# Altium PCB PCB.PcbDoc
Units mil, origin at the board's own origin, x right, y up, seen from the top; angles counter-clockwise.
Board outline 2030 x 1810 mil, 2 copper layers (Top Layer, Bottom Layer); 29 components, 24 nets, 96 pads, 0 vias.
Unrouted connection lines stored in the file: 3.
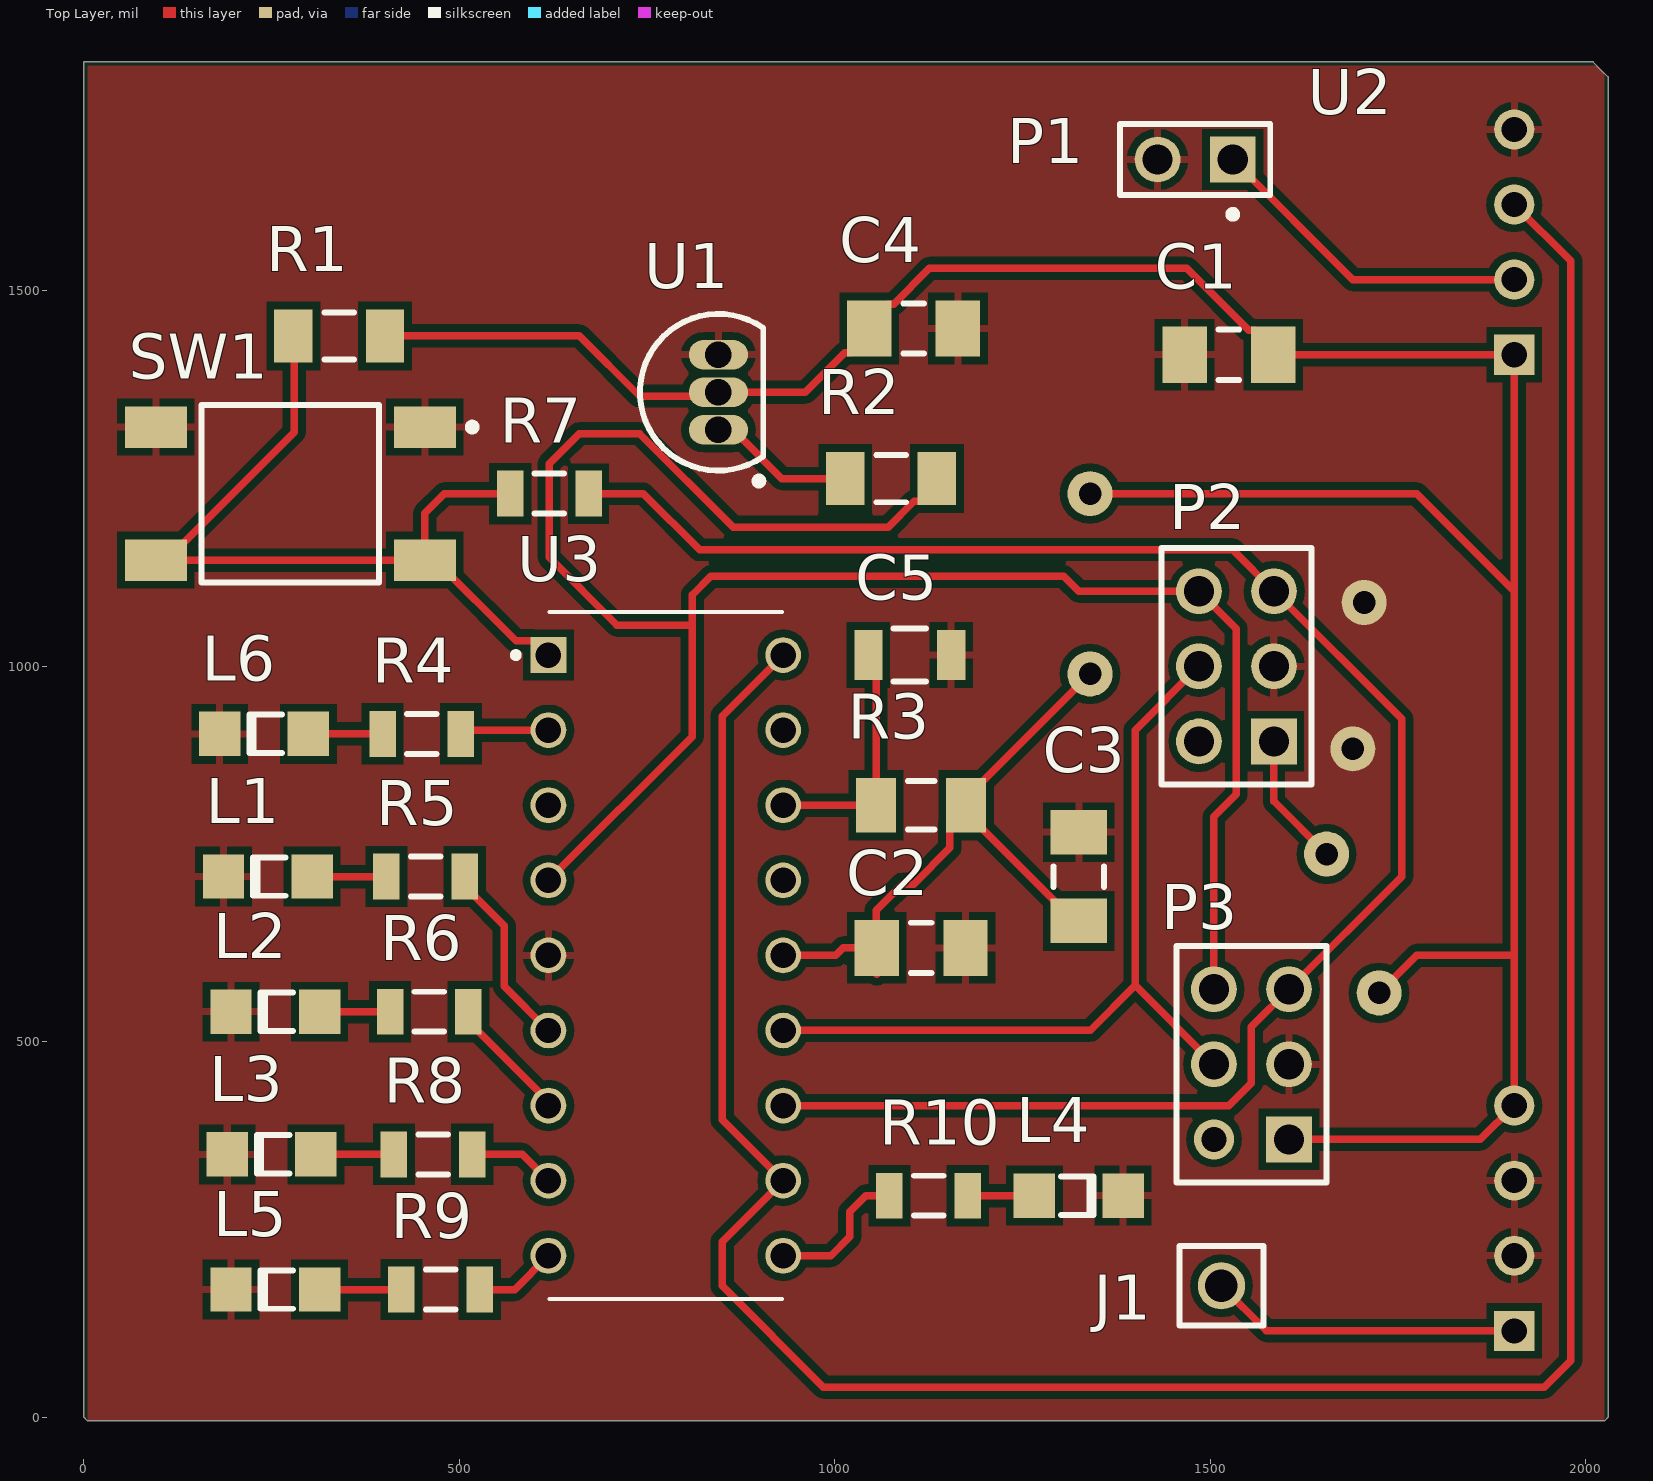
[diagram p0: Top Layer view]
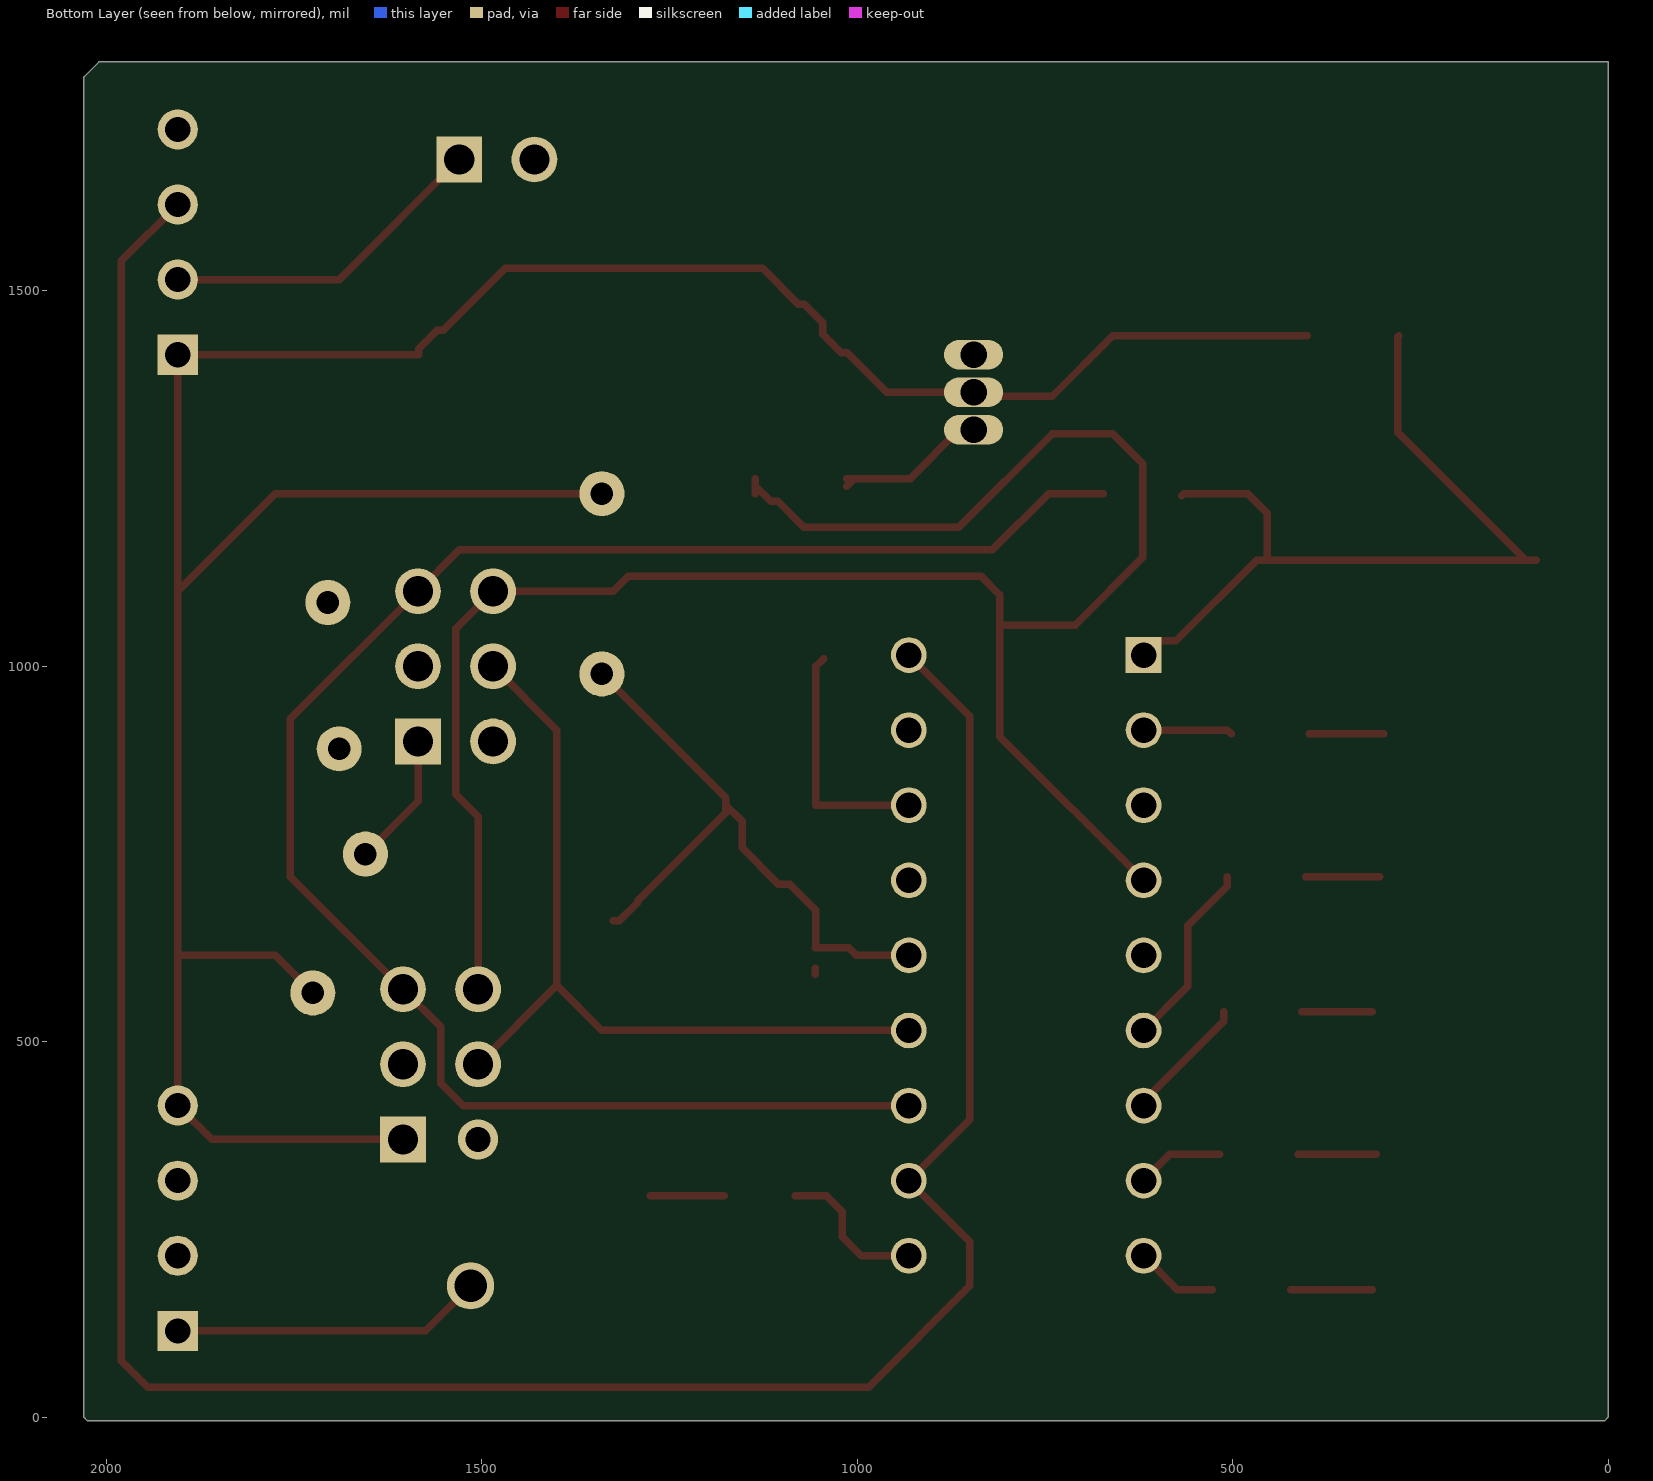
[diagram p1: Bottom Layer view, seen from below]

## Layer stack, top to bottom
Top Solder: solder mask 0.4, Solder Resist, Dk 3.5
Top Layer: signal copper 1.4
Dielectric 1: dielectric 12.6, FR-4, Dk 4.8
Bottom Layer: signal copper 1.4
Bottom Solder: solder mask 0.4, Solder Resist, Dk 3.5

## Board outline
5,-5 2025,-5 2030,0 2030,1785 2010,1805 0,1805 0,0

## Design rules (kind name [scope] priority, off if disabled: settings)
Clearance GND [InNamedPolygon('Top Layer-No Net')] p1: gap=10 ignorepadtopadclearanceinfootprint=FALSE except(0: Arc-Hole Track-Hole SMDPad-Hole THPad-Hole Via-Hole Fill-Hole Poly-Hole Region-Hole Text-Hole)
Clearance Clearance_2 [InNamedPolygon('Top Layer-No Net')] p2: gap=10 ignorepadtopadclearanceinfootprint=FALSE except(0: Arc-Hole Track-Hole SMDPad-Hole THPad-Hole Via-Hole Fill-Hole Poly-Hole Region-Hole Text-Hole)
Clearance Clearance_1 [InNamedPolygon('Top Layer-No Net')] p3: gap=10 ignorepadtopadclearanceinfootprint=FALSE except(0: Arc-Hole Track-Hole SMDPad-Hole THPad-Hole Via-Hole Fill-Hole Poly-Hole Region-Hole Text-Hole)
Clearance [All] p4: gap=10 ignorepadtopadclearanceinfootprint=FALSE except(0: Arc-Hole Track-Hole SMDPad-Hole THPad-Hole Via-Hole Fill-Hole Poly-Hole Region-Hole Text-Hole)
PolygonConnect [All] p1: connectstyle=Relief reliefconductorwidth=10 reliefentries=4 polygonreliefangle="90 Angle" airgapwidth=10
RoutingVias [All] p1: holewidth=28 width=50 viastyle="Through Hole" minholewidth=28 minwidth=50 maxholewidth=28 maxwidth=50
SolderMaskExpansion [All] p1: expansion=4
Width [All] p1: maxlimit=12 minlimit=10 preferedwidth=12 minimp=50.000000 maximp=50.000000 favimp=50.000000
30 further rules are at their usual default settings.

## Components (designator, comment, footprint, x,y, rotation, side; value= is the part's Value field where it differs from the comment)
C1 "100nF 1206" KEMT-1206-2_M 1525,1415 r0 top
C2 "10uF 1206" CAPC3216X180X50ML20T25 1115,625 r180 top
C3 "100nF 1206" KEMT-1206-2_M 1325,720 r270 top
C4 "100nF 1206" KEMT-1206-2_M 1105,1450 r180 top
C5 "22pF 1206" FP-C1206C-EB-MFG 1100,1015 r0 top value="22 pF"
J1 "ANTENA" 61300111121 1515,175 r0 top
L1 "1206" 1206_A 245,720 r0 top (schematic designator LED1)
L2 "1206" 1206_A 255,540 r0 top (schematic designator LED2)
L3 "1206" 1206_A 250,350 r0 top (schematic designator LED3)
L4 "1206" 1206_A 1325,295 r180 top (schematic designator LED4)
L5 "1206" 1206_A 255,170 r0 top (schematic designator LED5)
L6 "1206" 1206_A 240,910 r0 top (schematic designator LED6)
P1 "GOLDPIN" AMPH-68000-102HLF_V 1480,1675 r180 top
P2 "Goldpin męski 2x3" SMTC-TSW-103-08-X-D#1 1585,900 r90 top
P3 "Goldpin męski 2x3" SMTC-TSW-103-08-X-D#2 1605,370 r90 top
R1 "10k 1206" RESC3216X60X45ML10T20 340,1440 r180 top
R2 "1206 10k" RESC3216X60X45ML10T20 1075,1250 r0 top
R3 "4.7k 1206" RESC3216X60X45ML15T20 1115,815 r0 top
R4 "1k 1206 5%" RESC3216X70X50LL05T20 450,910 r0 top
R5 "1k 1206 5%" RESC3216X70X50LL05T20 455,720 r0 top
R6 "1k 1206 5%" RESC3216X70X50LL05T20 460,540 r0 top
R7 "100k 1206" RESC3216X70X50LL05T20 620,1230 r180 top
R8 "1k 1206 5%" RESC3216X70X50LL05T20 465,350 r0 top
R9 "1k 1206 5%" RESC3216X70X50LL05T20 475,170 r0 top
R10 "1k 1206 5%" RESC3216X70X50LL05T20 1125,295 r0 top
SW1 "TL3301NF160QG" ESWI-TL3301NF160QG_V 275,1230 r180 top
U1 "MCP100-450DI/TO" TO-92-TO3 845,1365 r0 top
U2 "RXB6" JMR-TX1 1905,265 r90 top
U3 "HCS512" *DIP794W47P254L2324H457Q18 775,615 r0 top

## Footprints (in the part's own frame and the unit in brackets; to place one, negate y for a bottom-side part, rotate by r counter-clockwise, add the part's x,y. Pads: shape width x height; smd on the part's side, far side on the other; paste and mask are expansions set on the pad)
1206_A [mm] "Chip LED, 2-Leads, Body 3.2x1.6mm, IPC Medium Density"
  rect 1.4x1.5 smd: 1(-1.5,0) 2(1.5,0)
  silkscreen extent -0.5,-0.66 0.6,0.65, body extent -1.6,-0.8 1.6,0.8, height 0.68
61300111121 [mm] "Pin Header, pitch 2.54 mm, THT, Vertical, single row, 1p"
  round 1.6 hole 1.1: 1(0,0)
  silkscreen extent -1.42,-1.35 1.42,1.35, body extent -1.27,-1.27 1.27,1.27, height 8.57
*DIP794W47P254L2324H457Q18 [mm]
  rect 1.21x1.21 hole 0.86: 1(-3.97,10.16)
  round 1.21 hole 0.86: 2(-3.97,7.62) 3(-3.97,5.08) 4(-3.97,2.54) 5(-3.97,0) 6(-3.97,-2.54) 7(-3.97,-5.08) 8(-3.97,-7.62) 9(-3.97,-10.16) 10(3.97,-10.16) 11(3.97,-7.62) 12(3.97,-5.08) 13(3.97,-2.54) 14(3.97,0) 15(3.97,2.54) 16(3.97,5.08) 17(3.97,7.62) 18(3.97,10.16)
  silkscreen extent -5.17,-11.62 3.94,11.62
AMPH-68000-102HLF_V [mm] "THD, 2-Leads, Body 5.08x2.41mm, Pitch 2.54mm"
  rect 1.55x1.55 hole 1.02: 1(-1.27,0)
  round 1.55 hole 1.02: 2(1.27,0)
  silkscreen extent -2.54,-1.2 2.54,1.98, body extent -2.54,-1.2 2.54,1.2, height 8.38
CAPC3216X180X50ML20T25 [mm] "Chip Capacitor, 2-Leads, Body 3.40x1.80mm, IPC Low Density"
  rect 1.5x1.9 smd: 1(-1.5,0) 2(1.5,0)
  silkscreen extent -0.35,-0.85 0.35,0.85, body extent -1.7,-0.9 1.7,0.9, height 1.8
ESWI-TL3301NF160QG_V [mm] "SMD, 4-Leads, Body 6x6mm"
  rect 2.1x1.4 smd: 1(-4.55,-2.25) 2(4.55,-2.25) 3(-4.55,2.25) 4(4.55,2.25)
  silkscreen extent -6.28,-3 3,3, body extent -3,-3 3,3, height 4.3
FP-C1206C-EB-MFG [mm]
  rect 0.95x1.7 smd paste+0 mask+0: 1(-1.4,0) 2(1.4,0)
  silkscreen extent -0.55,-0.9 0.55,0.9, body extent -2,-1 2,1, height 0.25
JMR-TX1 [mil]
  rect 53.46x53.46 / inner rect 60x60 / far side rect 53.46x53.46 hole 33.46: 1(-150,0) 5(1150,0)
  round 53.46 / inner round 60 / far side round 53.46 hole 33.46: 2(-50,0) 3(50,0) 4(150,0) 6(1250,0) 7(1350,0) 8(1450,0)
KEMT-1206-2_M [mm] "SMD, 2-Leads, Body 3.4x1.8mm, IPC Low Density"
  rect 1.5x1.9 smd: 1(-1.5,0) 2(1.5,0)
  silkscreen extent -0.35,-0.85 0.35,0.85, body extent -1.7,-0.9 1.7,0.9, height 0.88
RESC3216X60X45ML10T20 [mm] "Chip Resistor, 2-Leads, Body 3.20x1.60mm, IPC Low Density"
  rect 1.3x1.8 smd: 1(-1.55,0) 2(1.55,0)
  silkscreen extent -0.5,-0.8 0.5,0.8, body extent -1.65,-0.85 1.65,0.85, height 0.6
RESC3216X60X45ML15T20 [mm] "Chip Resistor, 2-Leads, Body 3.3x1.75mm, IPC Low Density"
  rect 1.35x1.85 smd: 1(-1.525,0) 2(1.525,0)
  silkscreen extent -0.45,-0.82 0.45,0.82, body extent -1.65,-0.87 1.65,0.87, height 0.6
RESC3216X70X50LL05T20 [mm] "Chip Resistor, 2-Leads, Body 3.20x1.60mm, IPC High Density"
  rect 0.9x1.55 smd: 1(-1.325,0) 2(1.325,0)
  silkscreen extent -0.5,-0.67 0.5,0.67, body extent -1.63,-0.82 1.62,0.82, height 0.7
SMTC-TSW-103-08-X-D#1 [mm] ".025 SQ Post Terminal Strip Assembly, 2x3 Pins, Vertical, 2.54mm Pitch, Male"
  rect 1.55x1.55 hole 1.02: 1(0,0)
  round 1.55 hole 1.02: 2(0,2.54) 3(2.54,0) 4(2.54,2.54) 5(5.08,0) 6(5.08,2.54)
  silkscreen extent -1.46,-1.27 6.54,3.81, body extent -1.27,-1.27 6.35,3.81, height 8.38
SMTC-TSW-103-08-X-D#2 [mm] ".025 SQ Post Terminal Strip Assembly, 2x3 Pins, Vertical, 2.54mm Pitch, Male"
  rect 1.55x1.55 hole 1.02: 1(0,0)
  round 1.358 / inner round 1.524 / far side round 1.358 hole 0.85: 2(0,2.54)
  round 1.55 hole 1.02: 3(2.54,0) 4(2.54,2.54) 5(5.08,0) 6(5.08,2.54)
  silkscreen extent -1.46,-1.27 6.54,3.81, body extent -1.27,-1.27 6.35,3.81, height 8.38
TO-92-TO3 [mm] "TO, Flat Index; 3 In-Line, Axial Leads; Body Dia. 4.8mm; Leads 0.56 x 0.53 mm (max)"
  oval 2x1 hole 0.9: 1(0,-1.27) 2(0,0) 3(0,1.27)
  silkscreen extent -2.65,-3.13 1.52,2.65, body extent -2.65,-2.66 1.52,2.66, height 5.33

## Part data
C1 C3 C4: library part CMP-2000-05169-1, "CAP, Ceramic, 0.1 uF, +/- 10%, 50 V, -55 to 125 degC, 1206 (3216 Metric), RoHS, Tape and Reel", Capacitance=0.1µF, Capacitance Tolerance=±10%, Capacitor Case Style=1206[3216Metric], Dielectric Characteristic=X7R, Manufacturer=Kemet, Operating Temperature Max=125degC, Operating Temperature Min=-55degC, Package Description="2-Leads SMD, Body 3.2 x 1.6 mm", Package Reference=1206-2, Voltage Rating=50V, Datasheet URL=https://datasheet.ciiva.com/6125/1725438-6125494.pdf, Datasheet Version=Jul-13, Manufacturer URL=http://www.kemet.com/, Packaging=Tape&Reel, Product Range=KEMET-CSeries, SVHC=ToBeAdvised
C2: library part CMP-1661-00005-1, "Multilayer Ceramic Capacitor, 10 uF, +/- 10%, 16 V, 1206 (3216 Metric), -55 to 125 degC, RoHS, Tape and Reel", Case\Package=0603, Case Code (Metric)=1608, Max Operating Temperature="155 degC", Min Operating Temperature="-55 degC", Package Quantity=5000, Power Rating="100 mW", Resistance="330 Ohm", Tolerance=1%, Voltage Rating="75 V", Case Code (Imperial)=0603, ComponentLink1Description="Manufacturer URL", ComponentLink1URL=http://www.avx.com/, ComponentLink2Description=Datasheet, ComponentLink2URL=http://datasheets.avx.com/X7RDielectric.pdf, DatasheetVersion=Jul-16, Height="0.45 mm", Length="1.6 mm", Mount="Surface Mount", PackageDescription="2-Pin Surface Mount Device, Body 3.2 x 1.6 mm", PackageReference=1206, Packaging="Tape and Reel", Pins=2, Radiation Hardening=No, REACH SVHC=Yes, RoHSCompliant=true, Weight="7.1E-05 oz", Width="0.8 mm"
C5: library part CMP-03020-001476-1, "1206 22pF Ceramic Multilayer Capacitor; 50VDC; 125degC; C0G Dielec; +/-5% SMD", Capacitance="22 pF", Manufacturer=KEMET, Manufacturer Part Number=C1206C220J5GACTU, Package=C1206C-EB, Temperature="-55°C to +150°C", Temperature Characteristic=C0G, Temperature Coefficient=15%, Temperature Range High=+150°C, Temperature Range Low=-55°C, Tolerance=0.05, Voltage Rating="50 V", Automotive=Yes, Automotive Grade="Grade 0", Category=Cap, ComponentLink2Description=Datasheet, ComponentLink2URL=https://content.kemet.com/datasheets/KEM_C1007_X8R_ULTRA_150C_SMD.pdf, Device Class L1="Passive Components", Device Class L2=Capacitors, Device Class L3="Ceramic Capacitors", Digikey Description="1206 22pF Ceramic Multilayer Capacitor; 50VDC; 125degC; C0G Dielec; +/-5% SMD", Height=0.88mm, Ipc Land Pattern Name=CAPC320160X78, Lead Free=Yes, Material=Ceramic, Mouser Description="1206 22pF Ceramic Multilayer Capacitor; 50VDC; 125degC; C0G Dielec; +/-5% SMD", Octopart=https://octopart.com/c1206c220j5gactu-kemet-131912, RoHS=TRUE
J1: library part CMP-1502-01058-1, "THT Vertical Pin Header WR-PHD, Pitch 2.54 mm, Single Row, 1 pins", Contact Resistance=20mOhm, Manufacturer="Wurth Elektronik", Operating Temperature=-40to105degC, Package Reference=61300111121, Rated Current=3A, Withstanding Voltage=500VAC, Working Voltage=250VAC, Datasheet URL=https://katalog.we-online.de/em/datasheet/6130xx11121.pdf, Gender=Male, Manufacturer URL=http://www.we-online.de, Mounting Technology=THT, Orientation=Vertical, Packaging=Bag, Part Number=61300111121, Pin Number=1, Pitch=2.54mm, Publisher=WurthElektronik, Row Number=Single
L1 L2 L3 L4 L5 L6: library part CMP-1426-00015-1, "SMD mono-color Chip LED, WL-SMCW, Blue", Color=Blue, Manufacturer="Wuerth Elektronik", PartNumber=150120BS75000, ComponentLink1Description="Manufacturer URL", ComponentLink1URL=http://www.we-online.com, ComponentLink2Description=Datasheet, ComponentLink2URL=http://katalog.we-online.com/led/datasheet/150120BS75000.pdf, PackageReference=1206_A
P1: library part CMP-2000-05666-1, "Male Header, Pitch 2.54 mm, 1 x 2 Position, Height 8.38 mm, Tail Length 2.41 mm, RoHS, Bulk", Current Rating=3A, Flammability Rating=UL94V-0, Insulation Resistance=5000MOhms, Manufacturer=FCI, Operating Temperature Range=-65Cto+125C, Package Description="Male Header, Pitch 2.54 mm, 1 x 2 Position, Height 8.38 mm, Tail Length 2.41 mm", Package Reference=68000-102HLF, Voltage Rating=1.5kV, Brand=FCI, Contact Gender=Pin(Male), Contact Material=PhosphorBronze, Contact Plating=Gold/GTX, Datasheet URL=https://datasheet.ciiva.com/5149/68000-274228-5149165.pdf, Datasheet Version="Rev. F, 04/2006", Factory Pack Quantity=100, Housing Material=Thermoplastic, Manufacturer URL=http://www.amphenol.com/, Mating Post Length=5.84mm, Mounting Angle=Vertical, Mounting Style=ThroughHole, Mounting Technology=ThroughHole, Number of Positions=2, Number of Positions / Contacts=2, Number of Rows=1, Packaging=Bulk, Pitch=2.54mm, Product Category=Headers&WireHousings, Product Type=Headers, RoHS=Details, Series=68000, Termination Post Length=2.41mm, Termination Style=ThroughHole, Type=Unshrouded
P2 P3: library part CMP-1024-00336-1, "0.025\" SQ Post Header, Through-hole, Vertical, -55 to 125 degC, 2.54 mm Pitch, 6-Pin, Male, RoHS", Manufacturer=Samtec, PartNumber=TSW-103-08-L-D, Temperature Range="-55 to 125 degC", ComponentLink1Description="Manufacturer URL", ComponentLink1URL=http://www.samtec.com, ComponentLink2Description=Datasheet, ComponentLink2URL=http://www.samtec.com/documents/webfiles/pdf/TSW_TH.PDF, ComponentLink3Description="Package Specification", ComponentLink3URL=http://www.samtec.com/documents/webfiles/cpdf/TSW-XXX-XX-XXX-X-XX-XXX-MKT.pdf, DatasheetVersion=F-214, Mounting Technology=Through-hole, Orientation=Vertical, PackageDescription=".025[0.64] SQ. Post Terminal Strip Assembly", PackageReference=TSW-103-08-X-D, PackageVersion="DM, 8/1988", Pitch="2.54 mm", RoHS=True
R1 R2: library part CMP-2003-04808-1, Manufacturer="Vishay Dale", Part Number=CRCW120610K0JNEA
R3: library part CMP-2100-03618-1, "Chip Resistor, 4.7 KOhm, +/- 1%, 0.25 W, -55 to 155 degC, 1206 (3216 Metric), RoHS, Tape and Reel", Case/Package=1206, Case Code (Metric)=3216, Manufacturer="Vishay Semiconductor", Max Operating Temperature=155degC, Max Power Dissipation=250mW, Min Operating Temperature=-55degC, Package Description="2-Pin Surface Mount Device, Body 3.15 x 1.6 mm", Package Quantity=10, Package Reference=1206.0, Resistance=4.7KOhm, Temperature Coefficient=100ppm/degreesC, Tolerance=1%, Voltage Rating=200V, Case Code (Imperial)=1206, Composition=ThickFilm, Contact Plating=Tin, Datasheet URL=http://www.vishay.com/docs/20035/dcrcwe3.pdf, Datasheet Version=41061.0, Depth=1.6mm, Height=0.55mm, Lead Free=LeadFree, Length=3.2mm, Manufacturer URL=http://www.vishay.com/, Military Standard=Not, Mount=SurfaceMount, Number of Terminations=2, Packaging=TapeandReel, Power Rating=250mW, Radiation Hardening=No, REACH SVHC=Unknown, RoHSCompliant=true, Termination=SMD/SMT, Voltage Rating (DC)=200V, Weight=0.000353oz, Width=1.6mm
R4 R5 R6 R8 R9 R10: library part CMP-2003-00544-1, Manufacturer=Panasonic, Part Number=ERJ-8GEYJ102V
R7: library part CMP-2003-00019-1, Manufacturer=Panasonic, Part Number=ERJ-8ENF1003V
SW1: library part CMP-2000-07250-1, "Tactile Switch, SPST-NO, 12 V, -20 to 70 degC, 4-Pin SMD, RoHS, Tape and Reel", Actuator Color=N/A, Contact Rating @ Voltage=0.05@12VDCA, Dielectric Strength=250VAC, Manufacturer=E-Switch, Maximum Contact Resistance=100mOhm, Maximum DC Voltage Rating=12V, Minimum Insulation Resistance=100MOhm, Operating Force=1.57N, Operating Temperature=-20to70C, Package Description="4-Pin Surface Mount Device, Body 6 x 6 mm", Actuator Length=0.7mm, Actuator Style=RoundButton, Base Material=N/A, Body Orientation=Straight, Contact Material=PhosphorBronze, Contact Plating=Silver, Datasheet URL=http://spec_sheets.e-switch.com/specs/P010515.pdf, Datasheet Version="Rev. C, 12/2010", Dimension=6x10x4.3mm, Electrical Life=100000Cycles, Family=TL, Ground Terminal=No, Housing Material=PolyphenyleneSulfide,Nylon, Illumination Type=N/R, Manufacturer URL=http://www.e-switch.ch/en/, Maximum AC Voltage Rating=N/A, Mechanical Life=N/A, Mounting=SurfaceMount,GullWing, Mounting Technology=SurfaceMount, Package Reference=TL3301NF160QG, Packaging=TapeandReel, Part No=TL3301NF160QG, Pole Throw Configuration=SPST, Product Weight=N/A, RoHS=Yes, Seal Description=N/A, Seal Location=N/A, Switch Configuration=N.O., Type=N/A
U1: library part CMP-0138-00082-1, "Microcontroller Supervisory Circuit with Push-Pull Output, 3-Pin TO-92, Industrial Temperature", DatasheetVersion="revF, 2001", PackageDescription="3-Lead Plastic Transistor Outline (TO) [TO-92]", PackageReference=TO-92-TO3, PackageVersion="revBB, Aug-2009"
U2: library part HXB6-*, Package=RXB6-XXX-V, DeviceSetName=HXB6-*, GateName_1=G$1, LibraryName=JMR_RF_Lib, SymbolName_1=RXB6-XXX-V

## Free pads (board coordinates)
  round 60 hole 30: 1(1340,989.8) 1(1655,750) 1(1705,1085) 1(1725,565) 2(1340,1230) 2(1690,890)

## Nets (pads, with @x,y where several pads share a name; then routed paths per layer and width w, separated by ;. In a path a pad name is that pad's centre, name@x,y a point inside that pad or via, vN(x,y) a via of type N, cw(c..) or ccw(c..) an arc to the next point about the centre after c; other vN are vias at no path point)
GND: C1.1 C2.1 C3.1 C4.1 C5.2 L1.1 L2.1 L3.1 L4.1 L5.1 L6.1 P1.2 P2.3 P3.3 pad.1@1705,1085 pad.2@1690,890 SW1.1 SW1.2 U1.3 U2.2 U2.3 U2.8 U3.5
NetC5_1: C5.1 R3.1 U3.16 | length 322.8
  Top Layer w10: U3.16 R3.1 1054.96,999.92 C5.1@1044.88,1010
NetJ1_1: J1.1 U2.1 | length 414.9
  Top Layer w10: J1.1 1575,115 U2.1
NetLED1_2: L1.2 R5.1 | length 98.8
  Top Layer w10: L1.2 R5.1
NetLED2_2: L2.2 R6.1 | length 93.8
  Top Layer w10: L2.2 R6.1
NetLED3_2: L3.2 R8.1 | length 103.8
  Top Layer w10: L3.2 R8.1
NetLED4_2: L4.2 R10.2 | length 98.8
  Top Layer w10: R10.2 L4.2@1275.94,295
NetLED5_2: L5.2 R9.1 | length 108.8
  Top Layer w10: L5.2 R9.1
NetLED6_2: L6.2 R4.1 | length 98.8
  Top Layer w10: L6.2 R4.1
NetP1_1: P1.1 U2.6 | length 441.3
  Top Layer w10: P1.1 1690,1515 U2.6
NetP2_6: P2.6 P3.6 R2.2 U3.4 | length 2695.2
  Top Layer w10: U3.4 810,906.3 810,1055 ; R2.2@1136.02,1230.16 R2.2@1136.02,1240 ; R2.2 1136.02,1240.16 1115.43,1219.57 1105.59,1219.57 1071.02,1185 865,1185 740,1310 660,1310 620,1270 620,1145 710,1055 810,1055 ; P3.6 1505,799.49 1535,829.49 1535,1050 P2.6 1325,1100 1305,1120 835,1120 810,1095 810,1055
NetP2_MISO: 
NetP2_MOSI: P2.4 P3.4 U3.13 | length 1102.3
  Top Layer w10: U3.13 1340,515 1400,575 ; P2.4 1400,915 1400,575 ; P3.4 1400,575
NetP2_SCK: P2.5 P3.5 R7.1 U3.12 | length 2411.1
  Top Layer w10: R7.1 745,1230 820,1155 1530,1155 P2.5 1755,930 1755,720 P3.5 1555,520 1555,445 1525,415 U3.12
NetR1_2: R1.2 R7.2 SW1.3 SW1.4 U3.1 | length 1133.1
  Top Layer w10: SW1.4 SW1.4@109.65,1141.42 ; R1.2 280,1438.98 280,1311.77 SW1.4@109.65,1141.42 ; R7.2@567.83,1227.2 565.04,1230 480,1230 454.13,1204.13 SW1.3 ; U3.1 599.88,1033.82 575.51,1033.82 467.91,1141.42 SW1.3 ; SW1.4@109.65,1141.42 SW1.3
NetR2_1: R2.1 U1.1 | length 210
  Top Layer w10: U1.1 864.68,1315 929.68,1250 R2.1@1003.98,1250 ; R2.1@1013.98,1240 R2.1@1003.98,1250 ; R2.1 R2.1@1003.98,1250
NetR4_2: R4.2 U3.2 | length 118.6
  Top Layer w10: R4.2 507.17,915 U3.2
NetR5_2: R5.2 U3.6 | length 251.2
  Top Layer w10: R5.2 507.17,707.2 560,654.37 560,573.7 U3.6
NetR6_2: R6.2 U3.7 | length 169.1
  Top Layer w10: R6.2 512.17,527.2 618.7,420.67 U3.7
NetR8_2: R8.2 U3.8 | length 116
  Top Layer w10: R8.2 583.7,350 U3.8
NetR9_2: R9.2 U3.9 | length 110.2
  Top Layer w10: R9.2 573.7,170 U3.9
NetR10_1: R10.1 U3.10 | length 204.4
  Top Layer w10: U3.10 995,215 1020,240 1020,273.7 1041.3,295 R10.1 R10.1@1082.83,295
NetU2_7: U2.7 U3.11 U3.18 | length 3716.1
  Top Layer w10: U3.18@933.82,1017.52 U3.18 850,933.7 850,396.3 U3.11 850,233.7 850,175 985,40 1945,40 1980,75 1980,1540 U2.7
Vdd: C1.2 C2.2 C3.2 C4.2 P2.1 P3.1 pad.1@1340,989.8 pad.1@1655,750 pad.1@1725,565 pad.2@1340,1230 R1.1 R3.2 U1.2 U2.4 U2.5 U3.14 | length 4850.7
  Top Layer w10: R1.1 660,1440 740,1360 840,1360 U1.2 960.94,1365 1013.54,1417.6 1021.42,1417.6 1045.94,1442.13 C4.2 1045.94,1457.87 1070.47,1482.4 1078.35,1482.4 1125.94,1530 1469.06,1530 1551.65,1447.4 1559.53,1447.4 1584.06,1422.87 C1.2 U2.5 1905,1100 ; U3.14 1001.42,615 1011.42,625 C2.2 1055,625.94 1055,675 1090,710 1105,710 1153.46,758.46 1153.46,793.43 R3.2 ; C2.2@1055.94,590 C2.2@1055.94,597.87 ; C3.2 1317.13,660.94 1292.6,685.47 1292.6,687.6 1175.04,805.16 R3.2 ; pad.1@1340,989.8 1175.04,824.84 R3.2 ; pad.2@1340,1230 1775,1230 1905,1100 ; P2.1 1585,820 pad.1@1655,750 ; P3.1@1590,370 1860,370 U2.4 1905,615 ; pad.1@1725,565 1775,615 1905,615 ; 1905,615 1905,1100
pads on no net: P2.2 P3.2 U3.3 U3.15 U3.17

## Polygon pours and split planes (outlines as drawn)
GND on Top Layer "Top Layer-No Net" (solid, pour order 19): 5,-5 2025,-5 2025,1790 2015,1800 5,1800